# EAGLE board BT_HC05_v1 (EAGLE 6.4)
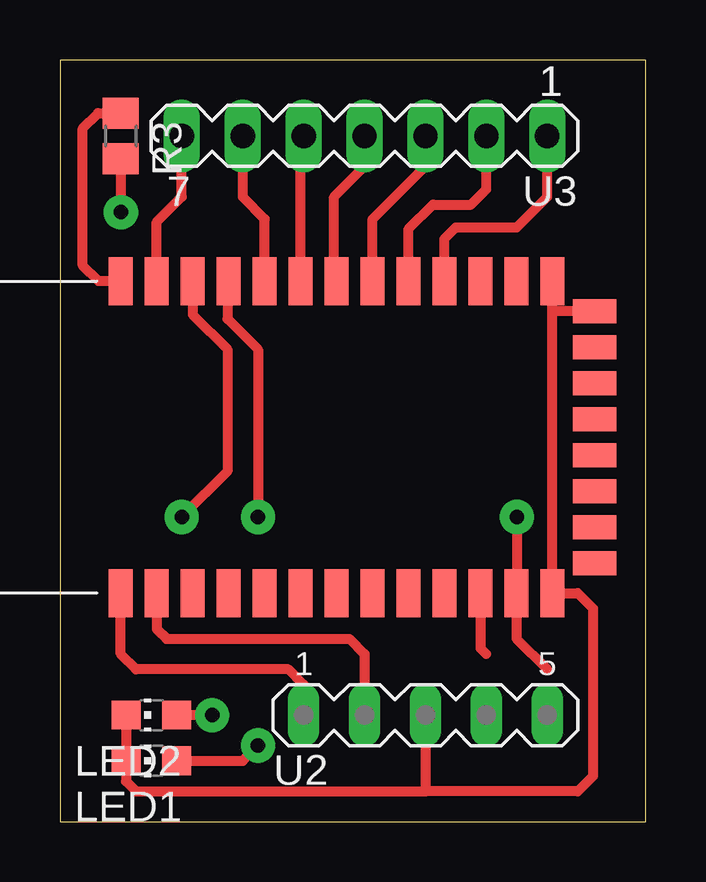
[diagram p0: board, top side]
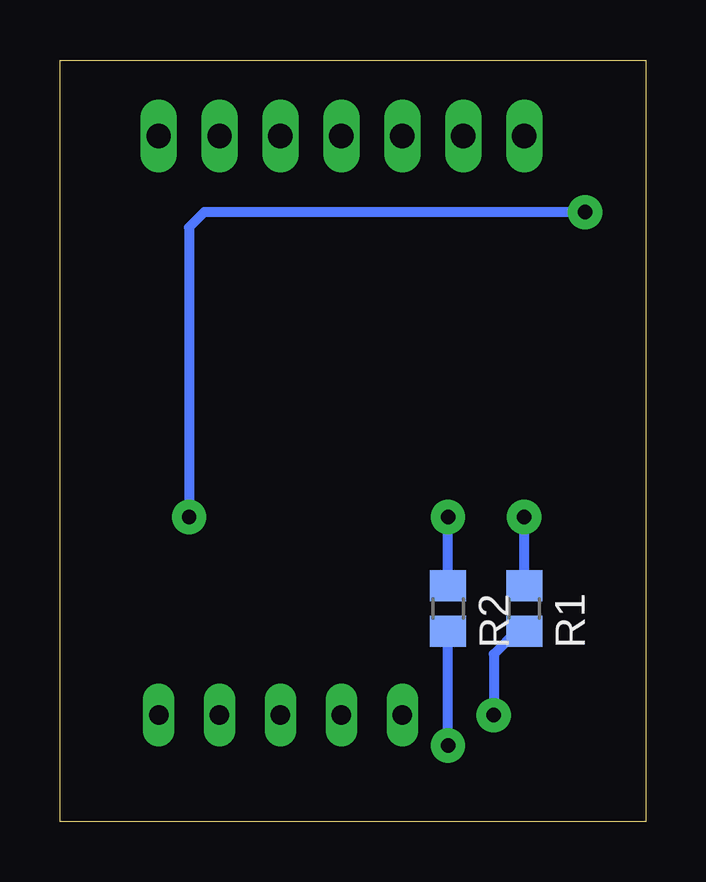
[diagram p1: board, bottom side, seen from below]

Size 24.43 x 31.74 mm. Coordinates in mm from the lower left corner, seen from the top.
Outline: 0,0 24.43,0 24.43,31.74 0,31.74 0,0
Copper layers (1*16): Top 0.035mm / dielectric 1.5mm / Bottom 0.035mm
Design rules "default": minimum track width 10mil, minimum drill 24mil, track to track 8mil, track to pad 8mil, pad to pad 8mil, via to via 8mil, smd to smd 8mil, copper to edge 40mil, drill to drill 8mil, minimum pad ring 10mil, minimum via ring 8mil, stop-mask expansion 4mil, vias tented up to drill 0mil, thermal gap 10mil

## Footprints (pad centres in the part's own frame; a part is rotated, then mirrored left to right if it is on the bottom)
CHIP-LED0805 = smd 1.2 x 1.2: A 0,-1.05; C 0,1.05
R0805 = smd 1.3 x 1.5: 1 -0.95,0; 2 0.95,0
BLUETOOTH_SMD = smd 2 x 1: 1 0,0; 2 0,-1.5; 3 0,-3; 4 0,-4.5; 5 0,-6; 6 0,-7.5; 7 0,-9; 8 0,-10.5; 9 0,-12; 10 0,-13.5; 11 0,-15; 12 0,-16.5; 13 0,-18; 22 13,-18; 23 13,-16.5; 24 13,-15; 25 13,-13.5; 26 13,-12; 27 13,-10.5; 28 13,-9; 29 13,-7.5; 30 13,-6; 31 13,-4.5; 32 13,-3; 33 13,-1.5; 34 13,0 | smd 1 x 1.8: 14 1.25,-19.75; 15 2.75,-19.75; 16 4.25,-19.75; 17 5.75,-19.75; 18 7.25,-19.75; 19 8.75,-19.75; 20 10.25,-19.75; 21 11.75,-19.75
MAR05-1 = drill 0.813 long: 1 -5.08,0; 2 -2.54,0; 3 0,0; 4 2.54,0; 5 5.08,0
MA07-1 = drill 1.016 long: 1 -7.62,0; 2 -5.08,0; 3 -2.54,0; 4 0,0; 5 2.54,0; 6 5.08,0; 7 7.62,0

## Placement (x,y rotation side)
LED1  SMD LED  [CHIP-LED0805]  3.81,2.54 90 top
LED2  SMD LED  [CHIP-LED0805]  3.81,4.45 90 top
R1  470  [R0805]  5.08,8.89 270 bottom
R2  470  [R0805]  8.26,8.89 270 bottom
R3  10K  [R0805]  2.54,28.57 270 top
U1  HC_05  [BLUETOOTH_SMD]  2.54,9.53 90 top
U2  Pin Row  [MAR05-1]  15.24,4.45 0 top
U3  Pin Row  [MA07-1]  12.7,28.57 180 top

## Library data of the parts
LED1 LED2 = led
R1-R3 = eagle-ltspice; SPICEMODEL: NONE; SPICEPREFIX: R
U1 = SerialPortBluetooth
U2 U3 = con-lstb; OC_FARNELL: unknown; OC_NEWARK: unknown

## Nets
CMD: R3.1 U1.34
GND: LED1.C LED2.C U1.13 U1.21 U1.22 U2.3
LED1: R2.1 U1.31
LED2: R1.1 U1.32
N$1: LED1.A R2.2
N$3: LED2.A R1.2
PIO2: U1.25 U3.1
PIO3: U1.26 U3.2
PIO4: U1.27 U3.3
PIO5: U1.28 U3.4
PIO6: U1.29 U3.5
PIO7: U1.30 U3.6
PIO10: U1.33 U3.7
RES: U1.11
RES2: U2.4
RX: U1.2 U2.2
TX: U1.1 U2.1
VCC: R3.2 U1.12
VCC2: U2.5

## Tracks (layer width: path | path; a pad name or v marks a point on that pad's centre or on a via)
CMD
  Top 0.406: U1.34 1.6,22.52 0.95,23.18 0.95,28.89 1.59,29.53 R3.1
GND
  Top 0.406: 20.54,21.27 U1.13 21.59,9.53 22.23,8.89 22.23,1.91 21.59,1.27 15.24,1.27 | 20.54,21.27 U1.22 | U1.21 20.54,21.27 | U2.3 15.24,1.27 | LED1.C LED2.C 2.76,1.68 3.17,1.27 15.24,1.27
LED1  (via drill 0.6 pad 1.42)
  Top 0.406: U1.31 6.99,22.47 6.99,20.95 8.26,19.68 v8.26,12.7
  Bottom 0.406: R2.1 v8.26,12.7
LED2  (via drill 0.6 pad 1.42)
  Top 0.406: U1.32 5.54,21.13 6.99,19.68 6.99,14.61 v5.08,12.7
  Bottom 0.406: R1.1 v5.08,12.7
N$1  (via drill 0.6 pad 1.42)
  Top 0.406: LED1.A 7.62,2.54 v8.26,3.17
  Bottom 0.406: v8.26,3.17 R2.2
N$3  (via drill 0.6 pad 1.42)
  Top 0.406: v6.35,4.45 LED2.A
  Bottom 0.406: R1.2 5.39,7.94 6.35,6.99 v6.35,4.45
PIO2
  Top 0.406: U1.25 16.04,24.29 16.51,24.76 19.05,24.76 20.32,26.04 U3.1
PIO3
  Top 0.406: U1.26 14.54,24.7 15.56,25.72 17.14,25.72 17.78,26.35 U3.2
PIO4
  Top 0.406: U1.27 13.04,25.1 15.24,27.3 U3.3
PIO5
  Top 0.406: U1.28 11.43,22.63 11.43,26.04 12.7,27.3 U3.4
PIO6
  Top 0.406: U1.29 10.04,28.45 U3.5
PIO7
  Top 0.406: U3.6 7.62,26.04 8.54,25.11 U1.30
PIO10
  Top 0.406: U1.33 4.04,24.99 5.08,26.04 U3.7
RES
  Top 0.406: U1.11 17.54,7.23 17.78,6.99
RX
  Top 0.406: U1.2 4.04,8.03 4.45,7.62 12.06,7.62 12.7,6.99 U2.2
TX
  Top 0.406: U2.1 10.16,5.71 9.53,6.35 3.17,6.35 2.54,6.99 U1.1
VCC  (via drill 0.6 pad 1.42)
  Top 0.406: 20.32,6.35 19.04,7.63 U1.12 v19.05,12.7 | R3.2 v2.54,25.4
  Bottom 0.406: v2.54,25.4 18.41,25.4 19.05,24.76 v19.05,12.7